# Altium PCB pressure_esp_pcb.PcbDoc
Units mm, origin at the board's own origin, x right, y up, seen from the top; angles counter-clockwise.
Board outline 38 x 27 mm, 2 copper layers (Top Layer, Bottom Layer); 29 components, 19 nets, 119 pads, 0 vias.
Unrouted connection lines stored in the file: 69.
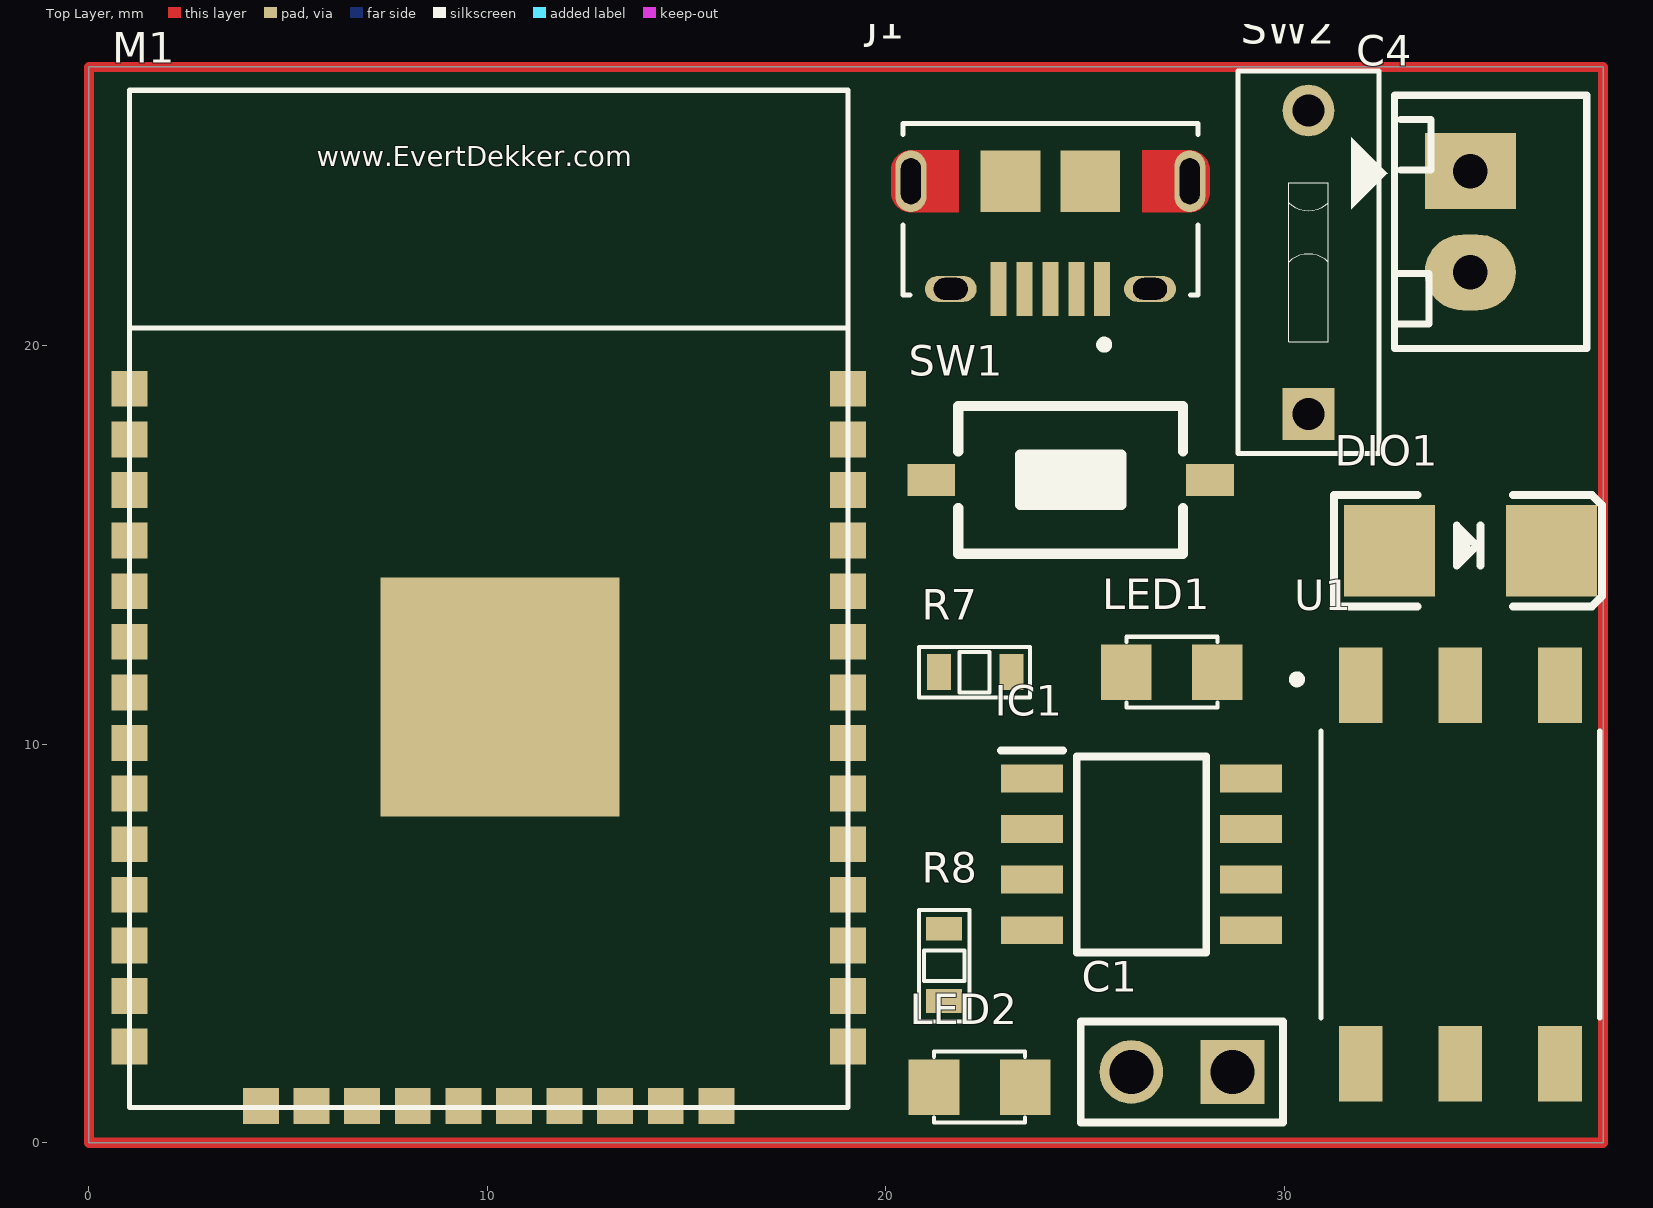
[diagram p0: Top Layer view]
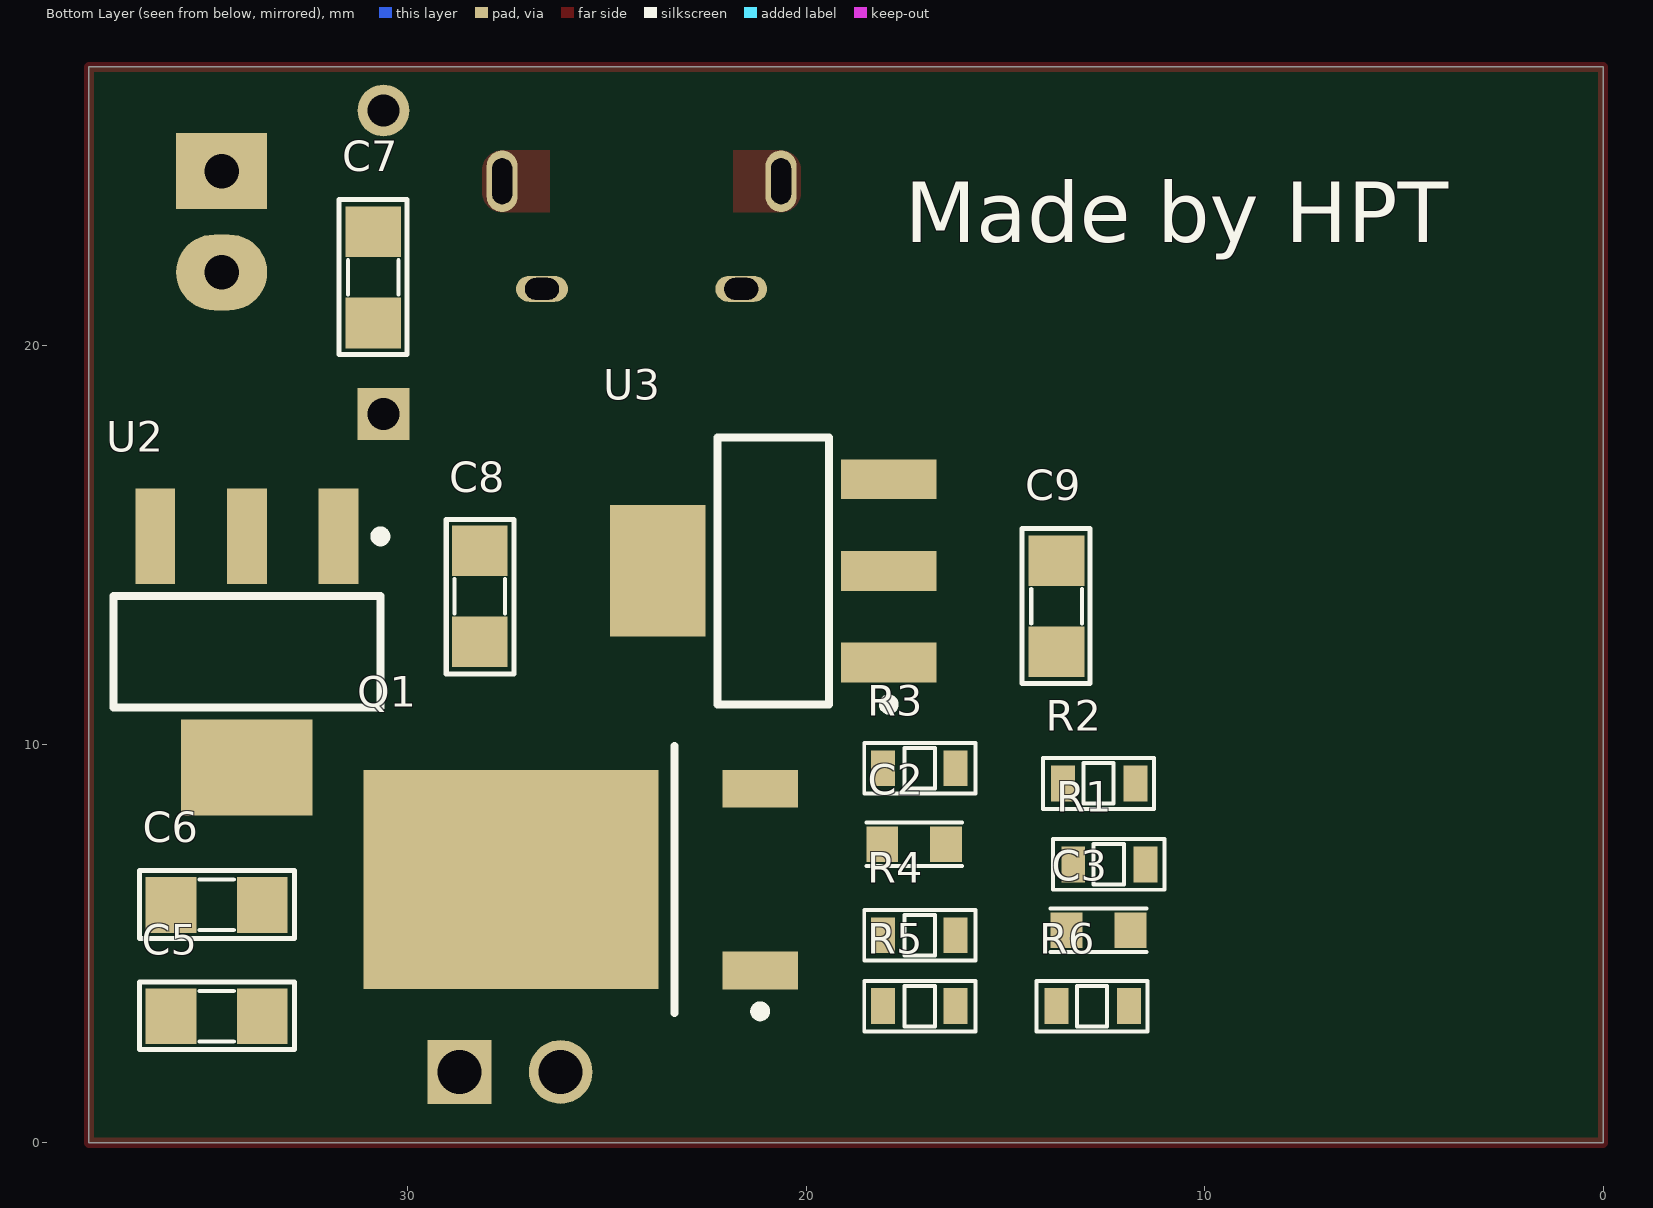
[diagram p1: Bottom Layer view, seen from below]

## Layer stack, top to bottom
Top Solder: solder mask 0.0102, Solder Resist, Dk 3.5
Top Layer: signal copper 0.0356
Dielectric 1: dielectric 0.32, FR-4, Dk 4.8
Bottom Layer: signal copper 0.0356
Bottom Solder: solder mask 0.0102, Solder Resist, Dk 3.5

## Board outline
0,0 0,27 38,27 38,0

## Design rules (kind name [scope] priority, off if disabled: settings)
Clearance [All] p1: gap=0.254
PolygonConnect [All] p1: connectstyle=Relief reliefconductorwidth=0.254 reliefentries=4 polygonreliefangle="90 Angle" airgapwidth=0.254
RoomDefinition pressure_esp_schematic [InComponentClass('pressure_esp_schematic')] p1: confinementstyle=ConfineIn formatcopy=TRUE lockcomponents=FALSE outline 42.164,0.635 135.255,0.635 135.255,29.718 42.164,29.718
RoutingVias [All] p1: holewidth=0.711 width=1.27 viastyle="Through Hole" minholewidth=0.711 minwidth=1.27 maxholewidth=0.711 maxwidth=1.27
SolderMaskExpansion [All] p1: expansion=0.102
Width [All] p1: maxlimit=0.254 minlimit=0.254 preferedwidth=0.254
30 further rules are at their usual default settings.

## Components (designator, comment, footprint, x,y, rotation, side; value= is the part's Value field where it differs from the comment)
C1 "JP2" JP2-D1T 28.702,1.778 r180 top
C2 "Capacitor SMD" CAP_0603 17.29,7.493 r180 bottom
C3 "Capacitor SMD" CAP_0603 12.662,5.334 r180 bottom
C4 "Header2" Header2 34.671,24.384 r270 top
C5 "104" SM-CAP-0805 33.655,3.175 r0 bottom
C6 "104" SM-CAP-0805 33.655,5.969 r0 bottom
C7 "104" SM-CAP-0805 30.861,22.86 r270 bottom
C8 "104" SM-CAP-0805 28.194,12.573 r90 bottom
C9 "104" SM-CAP-0805 13.716,14.605 r270 bottom
DIO1 "Diode SMD" DIO-SMD-106 34.671,14.859 r180 top
IC1 "TM7711" SOIC127P600X196-8N 26.416,7.239 r0 top
J1 "10118194-0001LF" AMPHENOL_10118194-0001LF 24.13,24.13 r180 top
LED1 "LED" LED-0805-Blue 28.321,11.811 r180 top
LED2 "LED" LED-0805-Blue 23.495,1.397 r180 top
M1 "ESP32S_Module" ESP32S 1.016,0.889 r0 top
Q1 "IRFR3910" TO-252AA_N 25.654,6.604 r0 bottom
R1 "10K" RES-SMD-0603 12.408,6.985 r180 bottom
R2 "10K" RES-SMD-0603 12.662,9.017 r180 bottom
R3 "1K" RES-SMD-0603 17.145,9.398 r0 bottom
R4 "10K" RES-SMD-0603 17.145,5.207 r0 bottom
R5 "100" RES-SMD-0603 17.145,3.429 r0 bottom
R6 "100" RES-SMD-0603 12.827,3.429 r180 bottom
R7 "100" RES-SMD-0603 22.225,11.811 r0 top
R8 "1K" RES-SMD-0603 21.463,4.445 r90 top
SW1 "Reset" SW1-SMD 24.638,16.637 r180 top
SW2 "Flash" SW-DIP1-1 30.607,22.098 r0 top
U1 "MPS20N0040D-D" XDCR_ADP5241 34.417,6.731 r0 top
U2 "LM1117-5V" SOT223 34.036,12.319 r0 bottom
U3 "LM1117-3.3V" SOT223 20.828,14.351 r90 bottom

## Footprints (in the part's own frame and the unit in brackets; to place one, negate y for a bottom-side part, rotate by r counter-clockwise, add the part's x,y. Pads: shape width x height; smd on the part's side, far side on the other; paste and mask are expansions set on the pad)
AMPHENOL_10118194-0001LF [mm]
  rect 0.4x1.35 smd: 1(-1.3,2.7) 2(-0.65,2.7) 3(0,2.7) 4(0.65,2.7) 5(1.3,2.7)
  oval 1.3x0.65 hole 0.55 slot 0.85 at 0 deg: S1(-2.5,2.7) S2(2.5,2.7)
  oval 0.775x1.55 hole 0.5 slot 1.15 at 90 deg: S3(-3.5,0) S6(3.5,0)
  rect 1.5x1.55 smd: S4(-1,0) S5(1,0)
  Top Layer region: 193 vertices and 0 holes, not listed, extent 2.3,-0.78 4,0.775
  Top Layer region: 193 vertices and 0 holes, not listed, extent -4,-0.775 -2.3,0.78
  silkscreen extent -3.7,-1.45 3.7,4.2, body extent -3.99,-2.67 4.06,2.91, height 3.12
CAP_0603 [mm]
  rect 0.8x0.9 smd: 1(-0.8,0) 2(0.8,0)
  silkscreen extent -1.2,-0.55 1.2,0.55, body extent -0.8,-0.4 0.8,0.4, height 0.9
DIO-SMD-106 [mil]
  rect 90x90.55 smd: 1(80,0) 2(-80,0)
  silkscreen extent -130,-55 135,55, body extent -99,-50 106,52, height 95
ESP32S [mm] "ESP32S-Module"
  rect 0.9x0.9 smd: 1(0,18.034) 2(0,16.764) 3(0,15.494) 4(0,14.224) 5(0,12.954) 6(0,11.684) 7(0,10.414) 8(0,9.144) 9(0,7.874) 10(0,6.604) 11(0,5.334) 12(0,4.064) 13(0,2.794) 14(0,1.524) 15(3.3,0.034) 16(4.57,0.034) 17(5.84,0.034) 18(7.11,0.034) 19(8.38,0.034) 20(9.65,0.034) 21(10.92,0.034) 22(12.19,0.034) 23(13.46,0.034) 24(14.73,0.034) 25(18.034,1.524) 26(18.034,2.794) 27(18.034,4.064) 28(18.034,5.334) 29(18.034,6.604) 30(18.034,7.874) 31(18.034,9.144) 32(18.034,10.414) 33(18.034,11.684) 34(18.034,12.954) 35(18.034,14.224) 36(18.034,15.494) 37(18.034,16.764) 38(18.034,18.034)
  rect 6x6 smd: 101(9.3,10.3)
  silkscreen extent 0,0 18.03,25.53, body extent 0,0 18.03,25.53, height 2
Header2 [mil] "CON2"
  rect 75x90 hole 34: 1(0,0)
  oval 75x90 hole 34: 2(100,0)
  silkscreen extent -75,-118 175,115, body extent -68,-70 168,107, height 236
JP2-D1T [mm] "2 pins, 1 row, straight, gold plating"
  rect 1.6x1.6 hole 1.1: 1(0,0)
  round 1.6 hole 1.1: 2(2.54,0)
  silkscreen extent -1.27,-1.27 3.81,1.27, body extent -1.27,-1.27 3.81,1.27, height 8.54
LED-0805-Blue [mil]
  rect 50x55 smd: 1(0,0) 2(90,0)
  silkscreen extent 0,-35 90,35, body extent 5,-25 85,25, height 43
RES-SMD-0603 [mm]
  rect 0.6x0.9 smd: 1(-0.889,0) 2(0.927,0)
  silkscreen extent -1.4,-0.64 1.4,0.64, body extent -0.8,-0.4 0.8,0.4, height 0.43
SM-CAP-0805 [mil]
  rect 50x55 smd: 1(0,0) 2(90,0)
  silkscreen extent -32,-34 121,33, body extent 6,-25 84,25, height 31
SOIC127P600X196-8N [mm]
  rect 1.55x0.7 smd: 1(-2.75,1.905) 2(-2.75,0.635) 3(-2.75,-0.635) 4(-2.75,-1.905) 5(2.75,-1.905) 6(2.75,-0.635) 7(2.75,0.635) 8(2.75,1.905)
  silkscreen extent -3.52,-2.46 1.63,2.61, body extent -3,-2.46 3,2.46, height 1.96
SOT223 [mm]
  rect 1x2.4 smd: 1(-2.3,-2.9) 2(0,-2.9) 3(2.3,-2.9)
  rect 3.3x2.4 smd: 4(0,2.9)
  silkscreen extent -3.47,-3.02 3.35,1.4, body extent -3.25,-3.56 3.25,3.4, height 1.68
SW1-SMD [mm]
  rect 1.2x0.8 smd: 1(-3.5,0) 2(3.5,0)
  silkscreen extent -2.82,-1.85 2.82,1.85, body extent -3.05,-1.85 3.05,1.85, height 2.5
SW-DIP1-1 [mm] "01p, 2.54mm Pitch, Horizontal, Box Type, THT, flat Actuator, red, without Tape, Tube"
  rect 1.3x1.3 hole 0.8: 1(0,-3.81)
  round 1.3 hole 0.8: 2(0,3.81)
  silkscreen extent -1.77,-4.8 1.77,4.8, body extent -1.77,-4.8 1.77,4.8, height 5.4
TO-252AA_N [mm] "D-PAK, 4-Leads, Body 6.1x6.5mm, Pitch 2.28mm, Lead Span 9.9mm, IPC Medium Density"
  rect 1.9x0.95 smd: 1(-4.5,2.28) 3(-4.5,-2.28)
  rect 7.4x5.5 smd: 4(1.75,0)
  silkscreen extent -4.62,-3.35 -2.35,3.43, body extent -2.25,-3.37 4.1,3.37, height 2.38
XDCR_ADP5241 [mm]
  rect 1.1x1.9 smd: 1(-2.5,4.75) 2(0,4.75) 3(2.5,4.75) 4(2.5,-4.75) 5(0,-4.75) 6(-2.5,-4.75)
  silkscreen extent -4.2,-3.6 3.5,5, body extent -3.5,-5 3.5,5, height 6.8

## Part data
C1: "WR-PHD 2.54 mm Angled Socket Header"
C4: "Header IDC, 2 x 1 Pin Vertical 2.54mm Pitch (Non-Boxed, Male)"
C5 C6 C7 C8 C9: library part CN
DIO1: "Default Diode"
IC1: "Integrated Circuit"
J1: "USB - micro B USB 2.0 Receptacle Connector 5 Position Surface Mount, Right Angle; Through Hole"
LED1 LED2: library part "LED SMD"
M1: "Esp-32S"
Q1: "HEXFET Power MOSFET"
R1 R2 R3 R4 R5 R6 R7 R8: library part Res-SMD, "Resistor"
SW1 SW2: library part SW2, "Switch button 2 pin"
U1: "Pressure Sensor 14.5PSI (100kPa) Vented Gauge Male - 0.12 (3mm) Tube 0 V ~ 4.5 V 6-SMD Module"
U2 U3: library part LM1117, "800mA Low-Dropout Linear Regulator"

## Nets (pads, with @x,y where several pads share a name; then routed paths per layer and width w, separated by ;. In a path a pad name is that pad's centre, name@x,y a point inside that pad or via, vN(x,y) a via of type N, cw(c..) or ccw(c..) an arc to the next point about the centre after c; other vN are vias at no path point)
3V3: C9.2 LED2.1 M1.2 R1.1 R2.2 U3.2
5V: C2.2 C7.2 C8.2 IC1.1 IC1.7 IC1.8 J1.1 LED1.1 U1.5 U2.2 U3.3
12V: C1.1 C4.2 C5.2 C6.2 DIO1.2 U2.3
DOUT: IC1.6 M1.11 R7.2
DSCK: IC1.5 M1.12
GND: C2.1 C4.1 C5.1 C6.1 C7.1 C8.1 C9.1 DIO1.1 IC1.2 J1.5 J1.S1 J1.S2 J1.S3 J1.S4 J1.S5 J1.S6 M1.1 M1.15 M1.38 M1.101 Q1.3 R4.2 R8.2 SW1.2 SW2.1 U1.2 U2.1 U3.1
MOTOR: M1.36 R3.1 R4.1
NetC1_2: C1.2 Q1.4
NetC3_1: C3.1 IC1.4 R6.2
NetC3_2: C3.2 IC1.3 R5.2
NetLED1_2: LED1.2 R7.1
NetLED2_2: LED2.2 R8.1
NetM1_3: M1.3 R2.1 SW1.1
NetM1_25: M1.25 R1.2 SW2.2
NetQ1_1: Q1.1 R3.2
NetR5_1: R5.1 U1.1 U1.6
NetR6_1: R6.1 U1.3
RX_1: J1.2 M1.35
TX_1: J1.3 M1.34
pads on no net: J1.4 M1.4 M1.5 M1.6 M1.7 M1.8 M1.9 M1.10 M1.13 M1.14 M1.16 M1.17 M1.18 M1.19 M1.20 M1.21 M1.22 M1.23 M1.24 M1.26 M1.27 M1.28 M1.29 M1.30 M1.31 M1.32 M1.33 M1.37 U1.4 U2.4 U3.4
copper on no net: | length 130
  Top Layer w0.254: 0,0 38,0 38,27 0,27 0,0

## Silkscreen, mask and mechanical layers (free items; w line width, h text height)
Bottom Overlay:
  text "Made by HPT" at 17.526,22.606 h1.52

## Dimensions
0,27 to 0,0 on Top Overlay
0,27 to 38,27 on Top Overlay

## Text inside footprints (layer, text, board x,y; h text height)
J1: Mechanical 13 "PCB END" at 26.08,26.23 h0.5 r180
M1: Top Overlay "www.EvertDekker.com" at 5.715,24.511 h0.5